# EAGLE board PANEL (EAGLE 8.0.1)
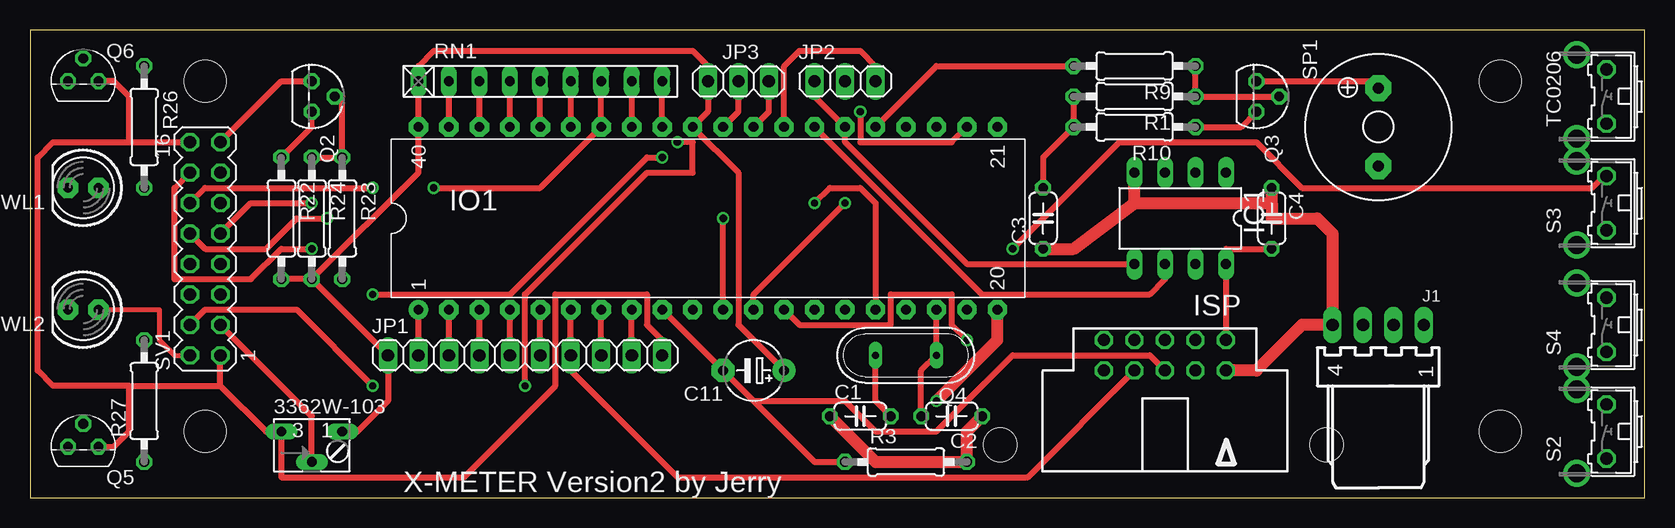
[diagram p0: board, top side]
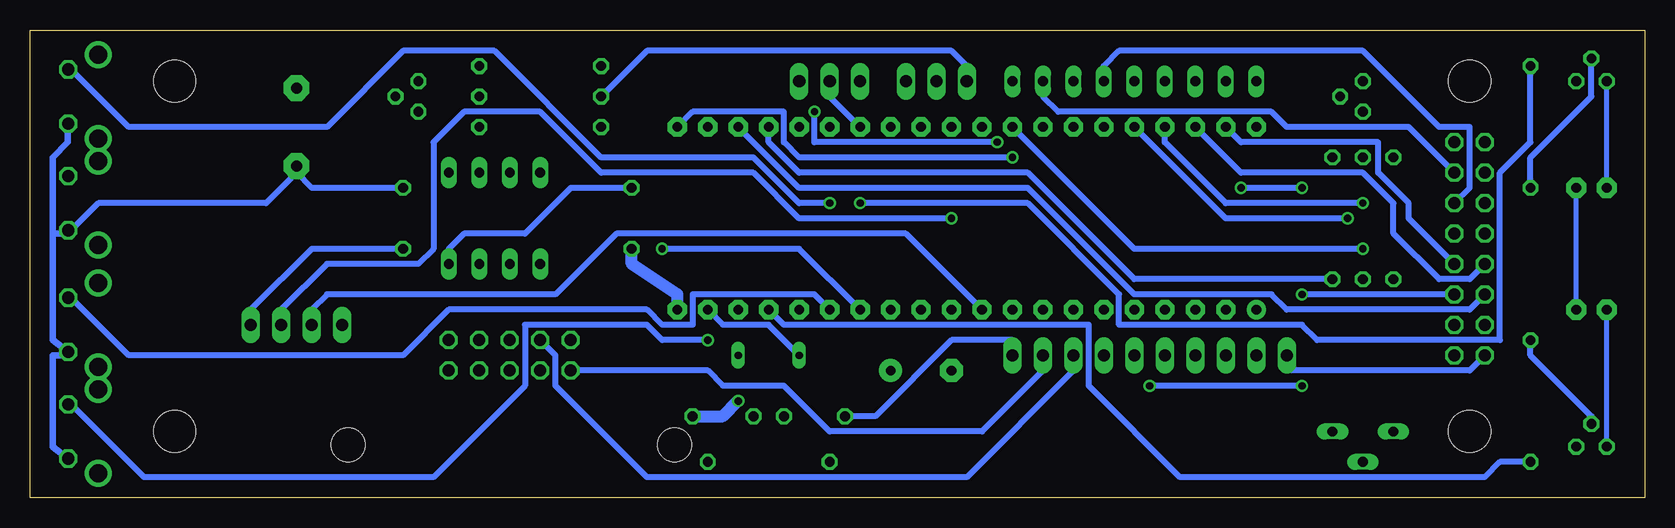
[diagram p1: board, bottom side, seen from below]

Size 134.6 x 39.04 mm. Coordinates in mm from the lower left corner, seen from the top.
Outline: 0,0 134.6,0 134.6,39.04 0,39.04 0,0
Copper layers (1*16): Top 0.035mm / dielectric 1.5mm / Bottom 0.035mm
Design rules "default": minimum track width 10mil, minimum drill 24mil, track to track 8mil, track to pad 8mil, pad to pad 8mil, via to via 8mil, smd to smd 8mil, copper to edge 40mil, drill to drill 8mil, minimum pad ring 10mil, minimum via ring 8mil, stop-mask expansion 4mil, vias tented up to drill 0mil, thermal gap 10mil
Net classes: 0 Signal: width 0.5 mm, clearance 0.013 mm; 1 Ground: width 1 mm, clearance 0.2 mm; 2 Power: width 1 mm, clearance 0.2 mm
Holes 3.5 mm at 14.6,34.76 14.6,5.55 122.55,34.76 122.55,5.55

## Footprints (pad centres in the part's own frame; a part is rotated, then mirrored left to right if it is on the bottom)
B64W = drill 0.813 long: A 2.54,0; E -2.54,0; S 0,-2.54
C050-024X044 = drill 0.813 octagon: 1 -2.54,0; 2 2.54,0
E5-5 = drill 0.813 pad 1.905: + -2.54,0 | drill 0.813 pad 1.905 octagon: - 2.54,0
DIL8 = drill 0.813 long: 1 -3.81,-3.81; 2 -1.27,-3.81; 3 1.27,-3.81; 4 3.81,-3.81; 5 3.81,3.81; 6 1.27,3.81; 7 -1.27,3.81; 8 -3.81,3.81
PDIP40 = drill 0.813 pad 1.6: 1 -19.05,-7.62 | drill 0.813 pad 1.6 octagon: 2 -16.51,-7.62; 3 -13.97,-7.62; 4 -11.43,-7.62; 5 -8.89,-7.62; 6 -6.35,-7.62; 7 -3.81,-7.62; 8 -1.27,-7.62; 9 1.27,-7.62; 10 3.81,-7.62; 11 6.35,-7.62; 12 8.89,-7.62; 13 11.43,-7.62; 14 13.97,-7.62; 15 16.51,-7.62; 16 19.05,-7.62; 17 21.59,-7.62; 18 24.13,-7.62; 19 26.67,-7.62; 20 29.21,-7.62; 21 29.21,7.62; 22 26.67,7.62; 23 24.13,7.62; 24 21.59,7.62; 25 19.05,7.62; 26 16.51,7.62; 27 13.97,7.62; 28 11.43,7.62; 29 8.89,7.62; 30 6.35,7.62; 31 3.81,7.62; 32 1.27,7.62; 33 -1.27,7.62; 34 -3.81,7.62; 35 -6.35,7.62; 36 -8.89,7.62; 37 -11.43,7.62; 38 -13.97,7.62; 39 -16.51,7.62; 40 -19.05,7.62
057-010-0 = drill 1 octagon: 1 -5.08,-5.08; 2 -5.08,-2.54; 3 -2.54,-5.08; 4 -2.54,-2.54; 5 0,-5.08; 6 0,-2.54; 7 2.54,-5.08; 8 2.54,-2.54; 9 5.08,-5.08; 10 5.08,-2.54 | hole 2.8: -13.48,3.66; 13.73,3.66
7395-04 = drill 1.016 long: 1 3.81,0; 2 1.27,0; 3 -1.27,0; 4 -3.81,0
1X10 = drill 1.016 long: 1 -11.43,0; 2 -8.89,0; 3 -6.35,0; 4 -3.81,0; 5 -1.27,0; 6 1.27,0; 7 3.81,0; 8 6.35,0; 9 8.89,0; 10 11.43,0
1X03 = drill 1.016 long: 1 -2.54,0; 2 0,0; 3 2.54,0
TO92 = drill 0.813 octagon: 1 1.27,0; 2 0,1.905; 3 -1.27,0
QS = drill 0.61 long: 1 -2.54,0; 2 2.54,0
0207/10 = drill 0.813 octagon: 1 -5.08,0; 2 5.08,0
RN-9 = drill 0.813 long: 1 -10.16,0; 2 -7.62,0; 3 -5.08,0; 4 -2.54,0; 5 0,0; 6 2.54,0; 7 5.08,0; 8 7.62,0; 9 10.16,0
B3F-31XX = drill 1.016 octagon: 1 -2.261,-1.245; 2 2.261,-1.245 | drill 1.499 pad 2.159: 3 -3.505,1.245; 4 3.505,1.245
KSS1201 = drill 0.914 pad 2.159 octagon: + 3.251,0; - -3.251,0
MA08-2 = drill 1.016 octagon: 1 -8.89,-1.27; 2 -8.89,1.27; 3 -6.35,-1.27; 4 -6.35,1.27; 5 -3.81,-1.27; 6 -3.81,1.27; 7 -1.27,-1.27; 8 -1.27,1.27; 9 1.27,-1.27; 10 1.27,1.27; 11 3.81,-1.27; 12 3.81,1.27; 13 6.35,-1.27; 14 6.35,1.27; 15 8.89,-1.27; 16 8.89,1.27
LED5MM = drill 0.813 pad 1.676 octagon: A -1.27,0; K 1.27,0

## Placement (x,y rotation side)
3362W-103  10K  [B64W]  23.49,5.55 0 top
C1  30pF  [C050-024X044]  69.21,6.82 0 top
C2  30pF  [C050-024X044]  76.83,6.82 180 top
C3  0.1uF  [C050-024X044]  84.45,23.33 90 top
C4  0.1uF  [C050-024X044]  103.5,23.33 270 top
C11  10uF/16v  [E5-5]  60.32,10.63 180 top
IC1  24LC01  [DIL8]  95.88,23.33 180 top
IO1  AT89S8253-24  [PDIP40]  51.43,23.33 0 top
ISP  ISP  [057-010-0]  94.61,8.09 180 top
J1  DLC  [7395-04]  112.39,14.44 0 top
JP1  EXT  [1X10]  41.27,11.9 0 top
JP2  JP2  [1X03]  67.94,34.76 0 top
JP3  JP3  [1X03]  59.05,34.76 0 top
Q2  BC557  [TO92]  23.49,33.49 270 top
Q3  BC557  [TO92]  102.23,33.49 270 top
Q4  22.118MHz  [QS]  73.02,11.9 180 top
Q5  BC547  [TO92]  4.44,4.28 0 top
Q6  BC547  [TO92]  4.44,34.76 0 top
R1  10K  [0207/10]  92.07,33.49 180 top
R3  10K  [0207/10]  73.02,3.01 0 top
R9  1K  [0207/10]  92.07,36.03 180 top
R10  10R  [0207/10]  92.07,30.95 180 top
R22  10R  [0207/10]  20.95,23.33 270 top
R23  1K  [0207/10]  26.03,23.33 270 top
R24  10K  [0207/10]  23.49,23.33 270 top
R26  10K  [0207/10]  9.52,30.95 270 top
R27  10K  [0207/10]  9.52,8.09 90 top
RN1  10K  [RN-9]  42.54,34.76 0 top
S2  BL  [B3F-31XX]  130.17,5.55 90 top
S3  UP  [B3F-31XX]  130.17,24.6 90 top
S4  DN  [B3F-31XX]  130.17,14.44 90 top
SP1  HCM1206X  [KSS1201]  112.39,30.95 90 top
SV1  LCD  [MA08-2]  14.6,20.79 90 top
TC0206  MENU  [B3F-31XX]  130.17,33.49 90 top
WL1  [LED5MM]  4.44,25.87 180 top
WL2  [LED5MM]  4.44,15.71 180 top

## Library data of the parts
3362W-103 = pot
C1-C4 C11 R1 R3 R9 R10 R22-R24 R26 R27 = rcl
IC1 = microchip
IO1 = atmel89cxxxx
ISP = con-panduit
J1 = con-molex
JP1-JP3 = pinhead
Q2 Q3 = transistor-pnp
Q4 = special
Q5 Q6 = transistor-npn
RN1 = resistor-net
S2-S4 TC0206 = switch-omron
SP1 = buzzer
SV1 = con-lstb
WL1 WL2 = led

## Nets
GND: 3362W-103.E C1.1 C2.1 C3.1 C4.1 IC1.4 IO1.20 ISP.2 J1.4 JP1.10 Q5.1 Q6.1 R3.2 S2.1 S3.1 S4.1 SP1.- SV1.1 SV1.16 TC0206.1
N$1: IO1.14 S3.2
N$2: Q2.3 SV1.15
N$3: IO1.15 S4.2
N$4: IO1.11 J1.2
N$5: IC1.5 IO1.26 JP2.1
N$6: IC1.6 IO1.27 JP2.2
N$7: IO1.38 RN1.3 SV1.8
N$8: C11.- IO1.9 ISP.6 R3.1
N$9: IO1.37 RN1.4 SV1.9
N$10: IO1.36 RN1.5 SV1.10
N$11: IO1.35 RN1.6 SV1.11
N$12: IO1.34 RN1.7 SV1.12
N$13: IO1.33 RN1.8 SV1.13
N$14: IO1.32 RN1.9 SV1.14
N$15: Q2.1 R22.1
N$16: IO1.23 SV1.6
N$17: 3362W-103.S SV1.3
N$19: IO1.13 S2.2
N$20: C1.2 IO1.19 Q4.2
N$21: IO1.10 J1.3
N$22: IO1.12 TC0206.2
N$23: IO1.8 ISP.10 JP1.9
N$24: Q3.3 SP1.+
N$25: IO1.28 JP2.3
N$27: IO1.6 ISP.8 JP1.7
N$28: Q2.2 R23.1 R24.1
N$37: Q3.2 R1.1 R9.1
N$40: Q3.1 R10.1
N$53: IO1.39 RN1.2 SV1.7
N$56: IO1.7 ISP.7 JP1.8
N$60: IO1.25 R9.2
N$62: IO1.22 SV1.4
N$63: IO1.21 SV1.5
N$64: IO1.24 R23.2
N$65: Q6.3 WL1.K
N$66: C2.2 IO1.18 Q4.1
N$71: Q6.2 R26.2
N$72: Q5.2 R27.2
N$73: IO1.16 R26.1
N$74: IO1.17 R27.1
N$78: IO1.5 JP1.6
N$79: IO1.3 JP1.4
N$80: IO1.4 JP1.5
N$81: IO1.2 JP1.3
N$82: IO1.1 JP1.2
N$99: IO1.30 JP3.2
N$100: IO1.29 JP3.3
VCC: 3362W-103.A C3.2 C4.2 C11.+ IC1.8 IO1.31 IO1.40 ISP.1 J1.1 JP1.1 JP3.1 R1.2 R10.2 R22.2 R24.2 RN1.1 SV1.2 WL1.A WL2.A
WL2: Q5.3 WL2.K

## Tracks (layer width: path | path; a pad name or v marks a point on that pad's centre or on a via)
GND  (via drill 0.61)
  Top 0.5: 8.25,29.68 SV1.16 | 8.25,29.68 8.25,33.49 6.98,34.76 Q6.1 | 15.87,9.36 SV1.1 | 8.25,9.36 15.87,9.36 | Q5.1 6.98,4.28 8.25,5.55 8.25,9.36 | 15.87,9.36 19.68,5.55 3362W-103.E 20.95,1.74 36.19,1.74 43.81,9.36 43.81,16.98 51.43,16.98 51.43,14.44 52.7,13.17 JP1.10 | 8.25,9.36 1.9,9.36 0.63,10.63 0.63,28.41 1.9,29.68 8.25,29.68
  Top 1.016: ISP.2 102.23,10.63 106.04,14.44 J1.4 108.58,22.06 107.31,23.33 103.5,23.33 103.5,24.6 | 103.5,24.6 C4.1 | 92.07,24.6 IC1.4 | 92.07,24.6 103.5,24.6 | 92.07,24.6 86.99,20.79 C3.1 | C1.1 70.48,3.01 R3.2 78.1,5.55 C2.1 | IO1.20 80.64,13.17 v75.56,8.09
  Bottom 0.5: C1.1 64.13,6.82 57.78,13.17 52.7,13.17 JP1.10 | C4.1 111.12,25.87 112.39,27.14 | 131.44,22.06 128.9,24.6 114.93,24.6 112.39,27.14 | 112.39,27.14 SP1.-
  Bottom 0.559: S2.1 132.71,4.28 132.71,11.9 131.44,11.9 S4.1 132.71,13.17 132.71,22.06 | S3.1 arc-280 131.44,22.06 132.71,22.06 | TC0206.1 131.44,29.68 132.71,28.41 132.71,22.06
  Bottom 1.016: IO1.20 80.64,16.98 84.45,19.52 C3.1 | v75.56,8.09 76.83,6.82 C2.1
N$1  (via drill 0.61)
  Top 0.5: v81.91,20.79 90.8,29.68 102.23,29.68 106.04,25.87 130.17,25.87 131.44,27.14 S3.2
  Bottom 0.5: v81.91,20.79 70.48,20.79 IO1.14
N$2
  Top 0.5: Q2.3 20.95,34.76 SV1.15
N$3
  Bottom 0.5: IO1.15 69.21,16.98 79.37,16.98 79.37,14.44 81.91,14.44 83.18,15.71 99.69,15.71 103.5,11.9 126.36,11.9 131.44,16.98 S4.2
N$4  (via drill 0.61)
  Top 0.5: IO1.11 v57.78,23.33
  Bottom 0.5: v57.78,23.33 70.48,23.33 74.29,27.14 86.99,27.14 92.07,32.22 98.42,32.22 100.96,29.68 100.96,20.79 102.23,19.52 109.85,19.52 113.66,15.71 J1.2
N$5
  Top 0.5: IC1.5 78.1,19.52 67.94,29.68 IO1.26 65.4,33.49 JP2.1
N$6
  Top 0.5: IO1.27 79.37,16.98 93.34,16.98 94.61,18.25 IC1.6
  Bottom 0.5: IO1.27 67.94,33.49 JP2.2
N$7
  Top 0.5: IO1.38 RN1.3
  Bottom 0.5: SV1.8 14.6,18.25 17.14,18.25 20.95,22.06 20.95,24.6 23.49,27.14 33.65,27.14 IO1.38
N$8
  Top 0.5: R3.1 65.4,3.01 60.32,8.09 | 60.32,8.09 C11.- IO1.9 | ISP.6 93.34,11.9 81.91,11.9 75.56,5.55 70.48,5.55 67.94,8.09 60.32,8.09
N$9  (via drill 0.61)
  Top 0.5: IO1.37 RN1.4 | SV1.9 18.41,24.6 v23.49,24.6
  Bottom 0.5: v23.49,24.6 34.92,24.6 40,29.68 IO1.37
N$10  (via drill 0.61)
  Top 0.5: IO1.36 RN1.5 | SV1.10 14.6,20.79 19.68,20.79 22.22,23.33 v24.76,23.33
  Bottom 0.5: v24.76,23.33 34.92,23.33 IO1.36
N$11
  Top 0.5: RN1.6 IO1.35
  Bottom 0.5: SV1.11 14.6,25.87 14.6,30.95 17.14,30.95 23.49,37.3 43.81,37.3 45.08,36.03 RN1.6
N$12  (via drill 0.61)
  Top 0.5: RN1.7 IO1.34 42.54,25.87 v33.65,25.87 | SV1.12 14.6,25.87 v28.57,25.87
  Bottom 0.5: v28.57,25.87 v33.65,25.87
N$13
  Top 0.5: RN1.8 IO1.33
  Bottom 0.5: SV1.13 19.68,30.95 29.84,30.95 31.11,32.22 48.89,32.22 50.16,33.49 RN1.8
N$14  (via drill 0.61)
  Top 0.5: IO1.32 RN1.9 | SV1.14 12.06,25.87 12.06,18.25 18.41,18.25 20.95,20.79 v23.49,20.79
  Bottom 0.5: v23.49,20.79 42.54,20.79 IO1.32
N$15
  Top 0.5: R22.1 23.49,30.95 Q2.1
N$16
  Bottom 0.5: SV1.6 14.6,15.71 29.84,15.71 31.11,16.98 42.54,16.98 51.43,25.87 70.48,25.87 IO1.23
N$17
  Top 0.5: 3362W-103.S 23.49,6.82 SV1.3
N$19  (via drill 0.61)
  Top 0.5: v78.1,13.17 76.83,14.44 76.83,16.98 71.75,16.98 71.75,14.44 64.13,14.44 IO1.13
  Bottom 0.5: v78.1,13.17 81.91,13.17 83.18,14.44 93.34,14.44 93.34,9.36 100.96,1.74 125.09,1.74 131.44,8.09 S2.2
N$20
  Top 0.5: Q4.2 70.48,8.09 C1.2
  Bottom 0.5: IO1.19 76.83,14.44 73.02,14.44 Q4.2
N$21
  Bottom 0.5: IO1.10 61.59,22.06 85.72,22.06 90.8,16.98 109.85,16.98 111.12,15.71 J1.3
N$22  (via drill 0.61)
  Top 0.5: v67.94,24.6 60.32,16.98 IO1.12
  Bottom 0.5: v67.94,24.6 70.48,24.6 74.29,28.41 86.99,28.41 95.88,37.3 103.5,37.3 109.85,30.95 126.36,30.95 131.44,36.03 TC0206.2
N$23
  Top 0.5: JP1.9 IO1.8
  Bottom 0.5: ISP.10 78.1,10.63 76.83,9.36 71.75,9.36 67.94,5.55 55.24,5.55 50.16,10.63 JP1.9
N$24
  Top 0.5: Q3.3 112.39,34.76 SP1.+
N$25
  Top 0.5: IO1.28 62.86,36.03 64.13,37.3 69.21,37.3 70.48,36.03 JP2.3
N$27
  Top 0.5: ISP.8 83.18,1.74 53.97,1.74 45.08,10.63 JP1.7 IO1.6
N$28
  Top 0.5: R24.1 R23.1 26.03,33.49 Q2.2
N$37
  Top 0.5: R9.1 R1.1 Q3.2
N$40
  Top 0.5: R10.1 100.96,30.95 Q3.1
N$53
  Top 0.5: IO1.39 RN1.2
  Bottom 0.5: SV1.7 19.68,23.33 19.68,24.6 22.22,27.14 22.22,29.68 33.65,29.68 IO1.39
N$56
  Top 0.5: JP1.8 IO1.7
  Bottom 0.5: ISP.7 90.8,11.9 90.8,9.36 83.18,1.74 56.51,1.74 47.62,10.63 JP1.8
N$60
  Top 0.5: R9.2 75.56,36.03 IO1.25
N$62  (via drill 0.61)
  Top 0.5: SV1.4 14.6,15.71 22.22,15.71 v28.57,9.36 | v41.27,9.36 41.27,16.98 51.43,27.14 55.24,27.14 55.24,29.68 v53.97,29.68 | v69.21,32.22 69.21,29.68 76.83,29.68 IO1.22
  Bottom 0.5: v28.57,9.36 v41.27,9.36 | v53.97,29.68 69.21,29.68 v69.21,32.22
N$63  (via drill 0.61)
  Top 0.5: v28.57,16.98 40,16.98 51.43,28.41 v52.7,28.41
  Bottom 0.5: SV1.5 v28.57,16.98 | v52.7,28.41 70.48,28.41 71.75,29.68 71.75,32.22 79.37,32.22 IO1.21
N$64
  Bottom 0.5: R23.2 42.54,18.25 51.43,27.14 70.48,27.14 73.02,29.68 IO1.24
N$65
  Bottom 0.406: WL1.K Q6.3
N$66
  Top 0.5: IO1.18 Q4.1 74.29,10.63 C2.2
N$71
  Bottom 0.5: R26.2 9.52,28.41 4.44,33.49 Q6.2
N$72
  Bottom 0.5: R27.2 9.52,11.9 4.44,6.82 Q5.2
N$73  (via drill 0.61)
  Top 0.5: v65.4,24.6 66.67,25.87 69.21,25.87 70.48,24.6 IO1.16
  Bottom 0.5: R26.1 9.52,29.68 12.06,27.14 12.06,13.17 27.3,13.17 28.57,14.44 43.81,14.44 43.81,16.98 51.43,24.6 v65.4,24.6
N$74
  Bottom 0.5: R27.1 12.06,3.01 13.33,1.74 38.73,1.74 46.35,9.36 46.35,14.44 71.75,14.44 IO1.17
N$78
  Top 0.5: JP1.6 IO1.5
N$79
  Top 0.5: JP1.4 IO1.3
N$80
  Top 0.5: JP1.5 IO1.4
N$81
  Top 0.5: JP1.3 IO1.2
N$82
  Top 0.5: JP1.2 IO1.1
N$99
  Top 0.5: IO1.30 59.05,32.22 JP3.2
N$100
  Top 0.5: IO1.29 61.59,32.22 JP3.3
VCC
  Top 0.406: SV1.2 12.06,11.9 10.79,13.17 10.79,15.71 WL2.A
  Top 0.5: R24.2 R22.2 | 3362W-103.A 27.3,5.55 29.84,8.09 JP1.1 R24.2 | R24.2 32.38,27.14 IO1.40 RN1.1 32.38,36.03 33.65,37.3 55.24,37.3 56.51,36.03 JP3.1 56.51,32.22 IO1.31 59.05,27.14 59.05,14.44 C11.+ | C3.2 84.45,28.41 R10.2 R1.2 | C4.2 99.69,20.79 IC1.8 ISP.1
  Bottom 0.406: WL2.A WL1.A
  Bottom 0.5: SV1.2 14.6,10.63 29.84,10.63 JP1.1 | C4.2 111.12,20.79 116.2,15.71 J1.1 | C3.2 89.53,25.87 93.34,22.06 98.42,22.06 99.69,20.79 IC1.8 | R1.2 83.18,37.3 57.78,37.3 56.51,36.03 JP3.1
WL2
  Bottom 0.406: Q5.3 WL2.K

## Text on the board
tNames: X-METER Version2 by Jerry
tValues: GND Rx Tx VCC | X-METER Version2 by JERRY